# Altium PCB CM-K230.pcbdoc
Units mm, origin at the board's own origin, x right, y up, seen from the top; angles counter-clockwise.
Board outline 51.79 x 52.17 mm, 2 copper layers (Top Layer, Bottom Layer); 1 components, 0 nets, 140 pads, 0 vias.
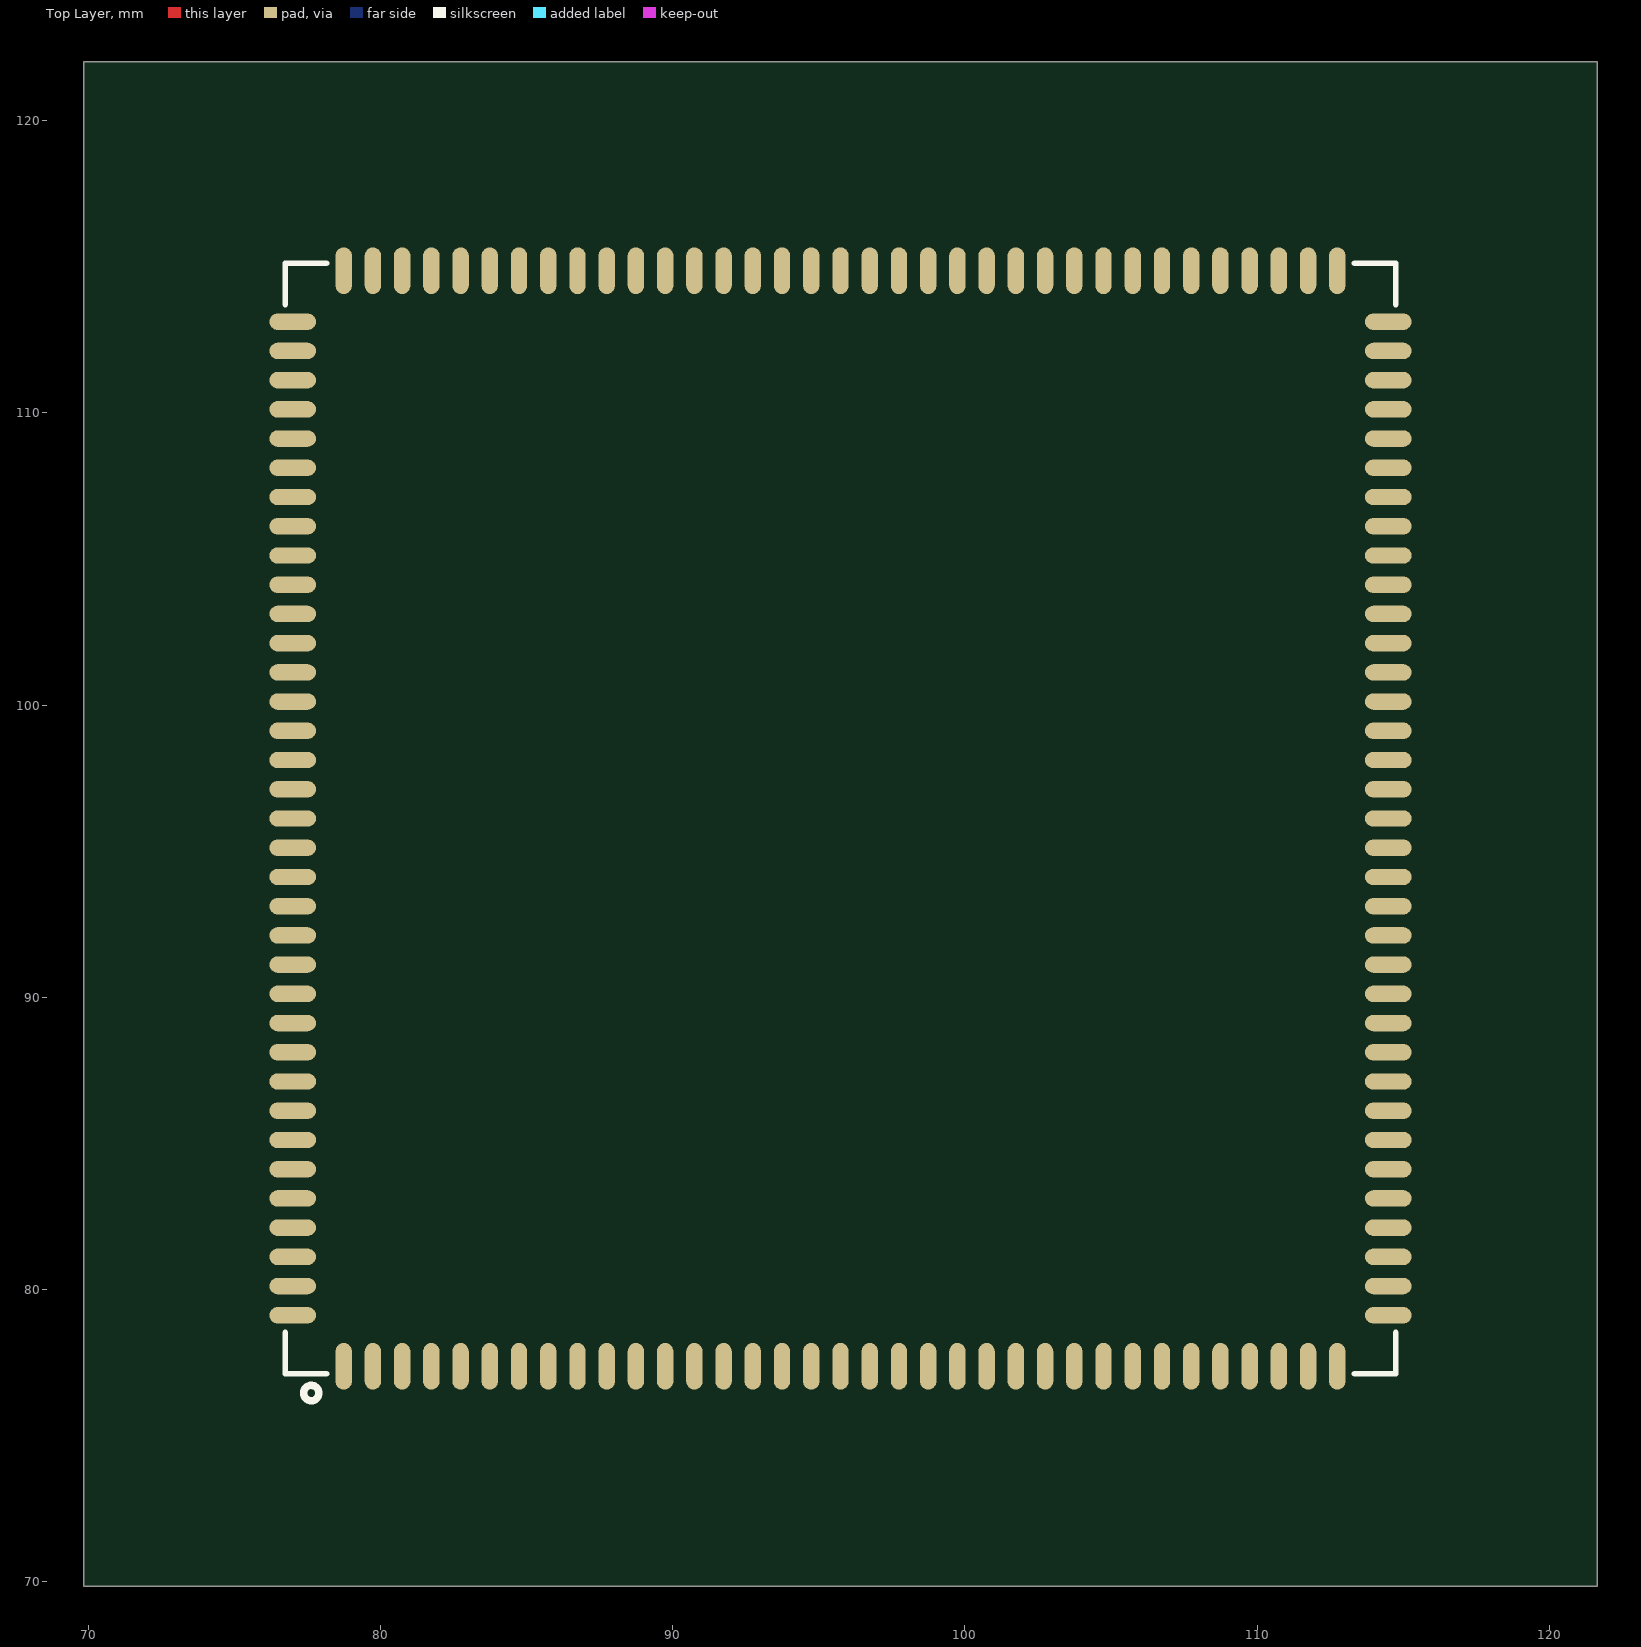
[diagram p0: Top Layer view]
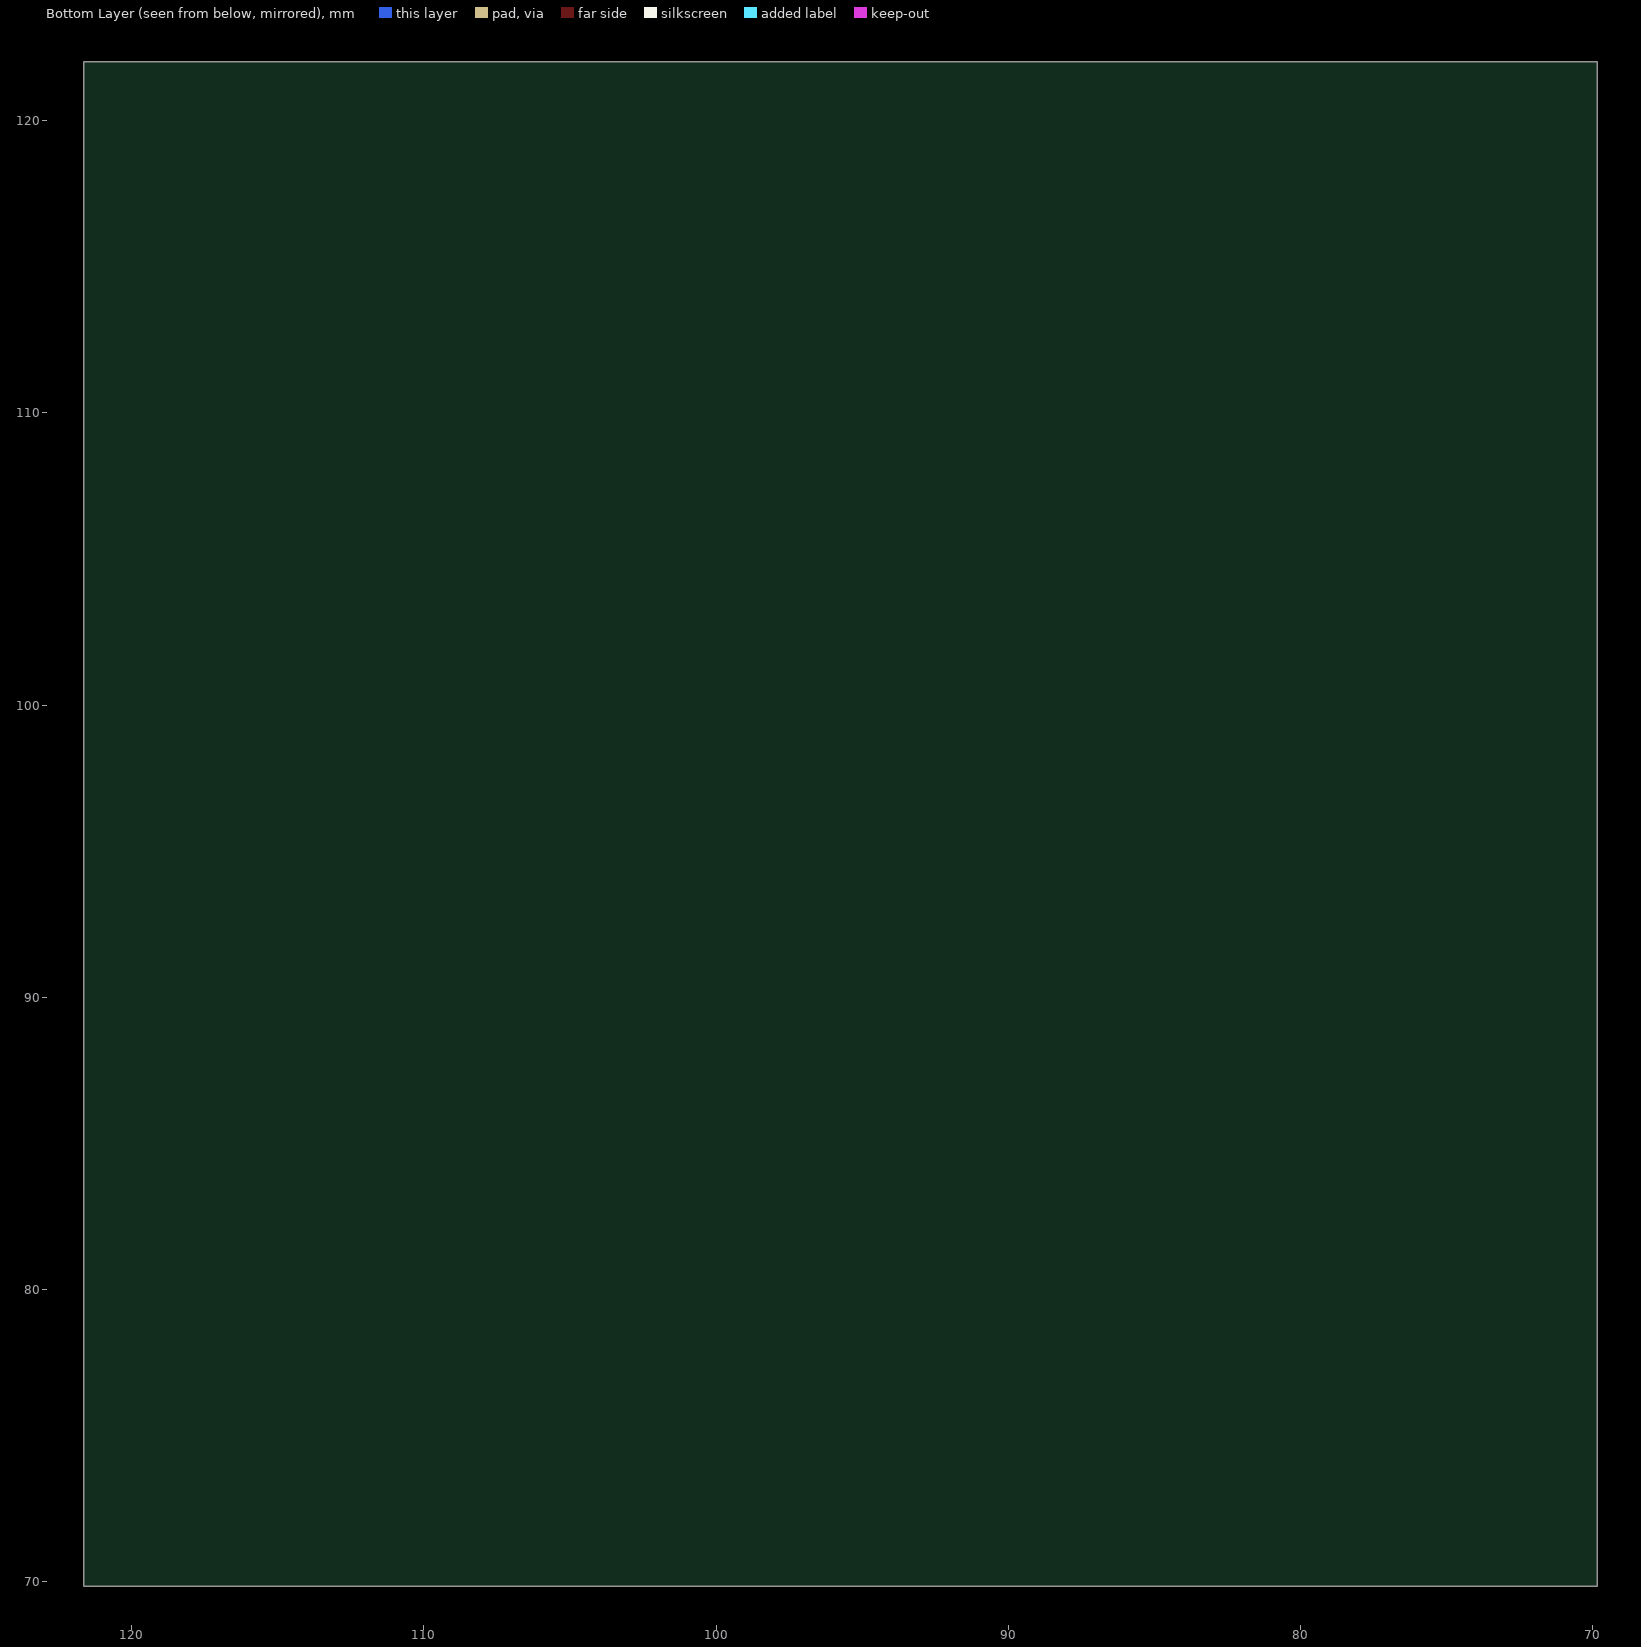
[diagram p1: Bottom Layer view, seen from below]

## Layer stack, top to bottom
Top Layer: signal copper (thickness not stored)
Dielectric: dielectric 0.32, FR-4, Dk 4.8
Bottom Layer: signal copper (thickness not stored)

## Board outline
121.642,69.85 69.85,69.85 69.85,122.018 121.642,122.018

## Design rules (kind name [scope] priority, off if disabled: settings)
BoardOutlineClearance safeClearance [All] p0: genericclearance=0.254 ignorepadtopadclearanceinfootprint=FALSE except(0: Arc-SplitContinuation Track-SplitContinuation SMDPad-SplitContinuation THPad-SplitContinuation Via-SplitContinuation Fill-SplitContinuation Poly-SplitContinuation Region-SplitContinuation Text-SplitContinuation; 0.152: Track-CutoutEdge SMDPad-CutoutEdge THPad-CutoutEdge Via-CutoutEdge Fill-CutoutEdge Region-CutoutEdge; 0.3: Track-OutlineEdge SMDPad-OutlineEdge THPad-OutlineEdge Via-OutlineEdge Fill-OutlineEdge Region-OutlineEdge Poly-OutlineEdge Text-OutlineEdge)
Clearance safeClearance [All] p1: gap=0.178 ignorepadtopadclearanceinfootprint=FALSE except(0.152: Track-Track Track-SMDPad SMDPad-SMDPad Track-THPad SMDPad-THPad THPad-THPad Track-Via SMDPad-Via THPad-Via Via-Via Track-Fill SMDPad-Fill THPad-Fill Via-Fill Fill-Fill Track-Region SMDPad-Region THPad-Region Via-Region Fill-Region Region-Region Track-Poly SMDPad-Poly THPad-Poly Via-Poly Fill-Poly Region-Poly Poly-Poly Track-Text SMDPad-Text THPad-Text Via-Text Fill-Text Region-Text Poly-Text Text-Text; 0.175: Track-Hole SMDPad-Hole THPad-Hole Via-Hole Fill-Hole Region-Hole Poly-Hole Text-Hole Sheet-Hole; 0.3: Track-Sheet SMDPad-Sheet THPad-Sheet Via-Sheet Fill-Sheet Region-Sheet Poly-Sheet Text-Sheet)
DiffPairsRouting differentialPair [All] p1: maxuncoupledlength=10 minlimit=6 maxlimit=6 mostfreqgap=6 toplayer_minwidth=5 toplayer_prefwidth=10 toplayer_maxwidth=100 bottomlayer_minwidth=5 bottomlayer_prefwidth=10 bottomlayer_maxwidth=100
PasteMaskExpansion pasteMaskExpansion [All] p1: expansion=0
PlaneConnect innerPlane [All] p1: planeconnectstyle=Relief reliefexpansion=0.508 reliefentries=4 reliefconductorwidth=0.254 reliefairgap=0.254
PolygonConnect copperRegion [All] p1: connectstyle=Relief reliefentries=4 reliefconductorwidth=10 polygonreliefangle="90 Angle" airgapwidth=10
RoutingVias viaSize [All] p1: viastyle="Through Hole" holewidth=12.0078 minholewidth=11.811 maxholewidth=236.2204 width=24.0158 minwidth=19.685 maxwidth=393.7008
SolderMaskExpansion solderMaskExpansion [All] p1: useseparateexpansions=TRUE expansion=2 expansionbottom=2
Width trackWidth [All] p1: maxlimit=100 minlimit=5 preferedwidth=10

## Components (designator, comment, footprint, x,y, rotation, side; value= is the part's Value field where it differs from the comment)
? "CM-3" CM-3 95.746,96.122 r0 top

## Footprints (in the part's own frame and the unit in brackets; to place one, negate y for a bottom-side part, rotate by r counter-clockwise, add the part's x,y. Pads: shape width x height; smd on the part's side, far side on the other; paste and mask are expansions set on the pad)
CM-3 [mm]
  oval 0.56x1.6 smd: 1(-17,-18.746) 2(-16,-18.746) 3(-15,-18.746) 4(-14,-18.746) 5(-13,-18.746) 6(-12,-18.746) 7(-11,-18.746) 8(-10,-18.746) 9(-9,-18.746) 10(-8,-18.746) 11(-7,-18.746) 12(-6,-18.746) 13(-5,-18.746) 14(-4,-18.746) 15(-3,-18.746) 16(-2,-18.746) 17(-1,-18.746) 18(0,-18.746) 19(1,-18.746) 20(2,-18.746) 21(3,-18.746) 22(4,-18.746) 23(5,-18.746) 24(6,-18.746) 25(7,-18.746) 26(8,-18.746) 27(9,-18.746) 28(10,-18.746) 29(11,-18.746) 30(12,-18.746) 31(13,-18.746) 32(14,-18.746) 33(15,-18.746) 34(16,-18.746) 35(17,-18.746) 71(17,18.746) 72(16,18.746) 73(15,18.746) 74(14,18.746) 75(13,18.746) 76(12,18.746) 77(11,18.746) 78(10,18.746) 79(9,18.746) 80(8,18.746) 81(7,18.746) 82(6,18.746) 83(5,18.746) 84(4,18.746) 85(3,18.746) 86(2,18.746) 87(1,18.746) 88(0,18.746) 89(-1,18.746) 90(-2,18.746) 91(-3,18.746) 92(-4,18.746) 93(-5,18.746) 94(-6,18.746) 95(-7,18.746) 96(-8,18.746) 97(-9,18.746) 98(-10,18.746) 99(-11,18.746) 100(-12,18.746) 101(-13,18.746) 102(-14,18.746) 103(-15,18.746) 104(-16,18.746) 105(-17,18.746)
  oval 1.6x0.56 smd: 36(18.746,-17) 37(18.746,-16) 38(18.746,-15) 39(18.746,-14) 40(18.746,-13) 41(18.746,-12) 42(18.746,-11) 43(18.746,-10) 44(18.746,-9) 45(18.746,-8) 46(18.746,-7) 47(18.746,-6) 48(18.746,-5) 49(18.746,-4) 50(18.746,-3) 51(18.746,-2) 52(18.746,-1) 53(18.746,0) 54(18.746,1) 55(18.746,2) 56(18.746,3) 57(18.746,4) 58(18.746,5) 59(18.746,6) 60(18.746,7) 61(18.746,8) 62(18.746,9) 63(18.746,10) 64(18.746,11) 65(18.746,12) 66(18.746,13) 67(18.746,14) 68(18.746,15) 69(18.746,16) 70(18.746,17) 106(-18.746,17) 107(-18.746,16) 108(-18.746,15) 109(-18.746,14) 110(-18.746,13) 111(-18.746,12) 112(-18.746,11) 113(-18.746,10) 114(-18.746,9) 115(-18.746,8) 116(-18.746,7) 117(-18.746,6) 118(-18.746,5) 119(-18.746,4) 120(-18.746,3) 121(-18.746,2) 122(-18.746,1) 123(-18.746,0) 124(-18.746,-1) 125(-18.746,-2) 126(-18.746,-3) 127(-18.746,-4) 128(-18.746,-5) 129(-18.746,-6) 130(-18.746,-7) 131(-18.746,-8) 132(-18.746,-9) 133(-18.746,-10) 134(-18.746,-11) 135(-18.746,-12) 136(-18.746,-13) 137(-18.746,-14) 138(-18.746,-15) 139(-18.746,-16) 140(-18.746,-17)
  silkscreen extent -19,-19.92 19,19

## Nets (pads, with @x,y where several pads share a name; then routed paths per layer and width w, separated by ;. In a path a pad name is that pad's centre, name@x,y a point inside that pad or via, vN(x,y) a via of type N, cw(c..) or ccw(c..) an arc to the next point about the centre after c; other vN are vias at no path point)
pads on no net: ?.1 ?.2 ?.3 ?.4 ?.5 ?.6 ?.7 ?.8 ?.9 ?.10 ?.11 ?.12 ?.13 ?.14 ?.15 ?.16 ?.17 ?.18 ?.19 ?.20 ?.21 ?.22 ?.23 ?.24 ?.25 ?.26 ?.27 ?.28 ?.29 ?.30 ?.31 ?.32 ?.33 ?.34 ?.35 ?.36 ?.37 ?.38 ?.39 ?.40 ?.41 ?.42 ?.43 ?.44 ?.45 ?.46 ?.47 ?.48 ?.49 ?.50 ?.51 ?.52 ?.53 ?.54 ?.55 ?.56 ?.57 ?.58 ?.59 ?.60 ?.61 ?.62 ?.63 ?.64 ?.65 ?.66 ?.67 ?.68 ?.69 ?.70 ?.71 ?.72 ?.73 ?.74 ?.75 ?.76 ?.77 ?.78 ?.79 ?.80 ?.81 ?.82 ?.83 ?.84 ?.85 ?.86 ?.87 ?.88 ?.89 ?.90 ?.91 ?.92 ?.93 ?.94 ?.95 ?.96 ?.97 ?.98 ?.99 ?.100 ?.101 ?.102 ?.103 ?.104 ?.105 ?.106 ?.107 ?.108 ?.109 ?.110 ?.111 ?.112 ?.113 ?.114 ?.115 ?.116 ?.117 ?.118 ?.119 ?.120 ?.121 ?.122 ?.123 ?.124 ?.125 ?.126 ?.127 ?.128 ?.129 ?.130 ?.131 ?.132 ?.133 ?.134 ?.135 ?.136 ?.137 ?.138 ?.139 ?.140